# Altium PCB PCB1.PcbDoc
Units mm, origin at the board's own origin, x right, y up, seen from the top; angles counter-clockwise.
Board outline 54 x 60 mm, 2 copper layers (Top Layer, Bottom Layer); 6 components, 0 nets, 6 pads, 0 vias.
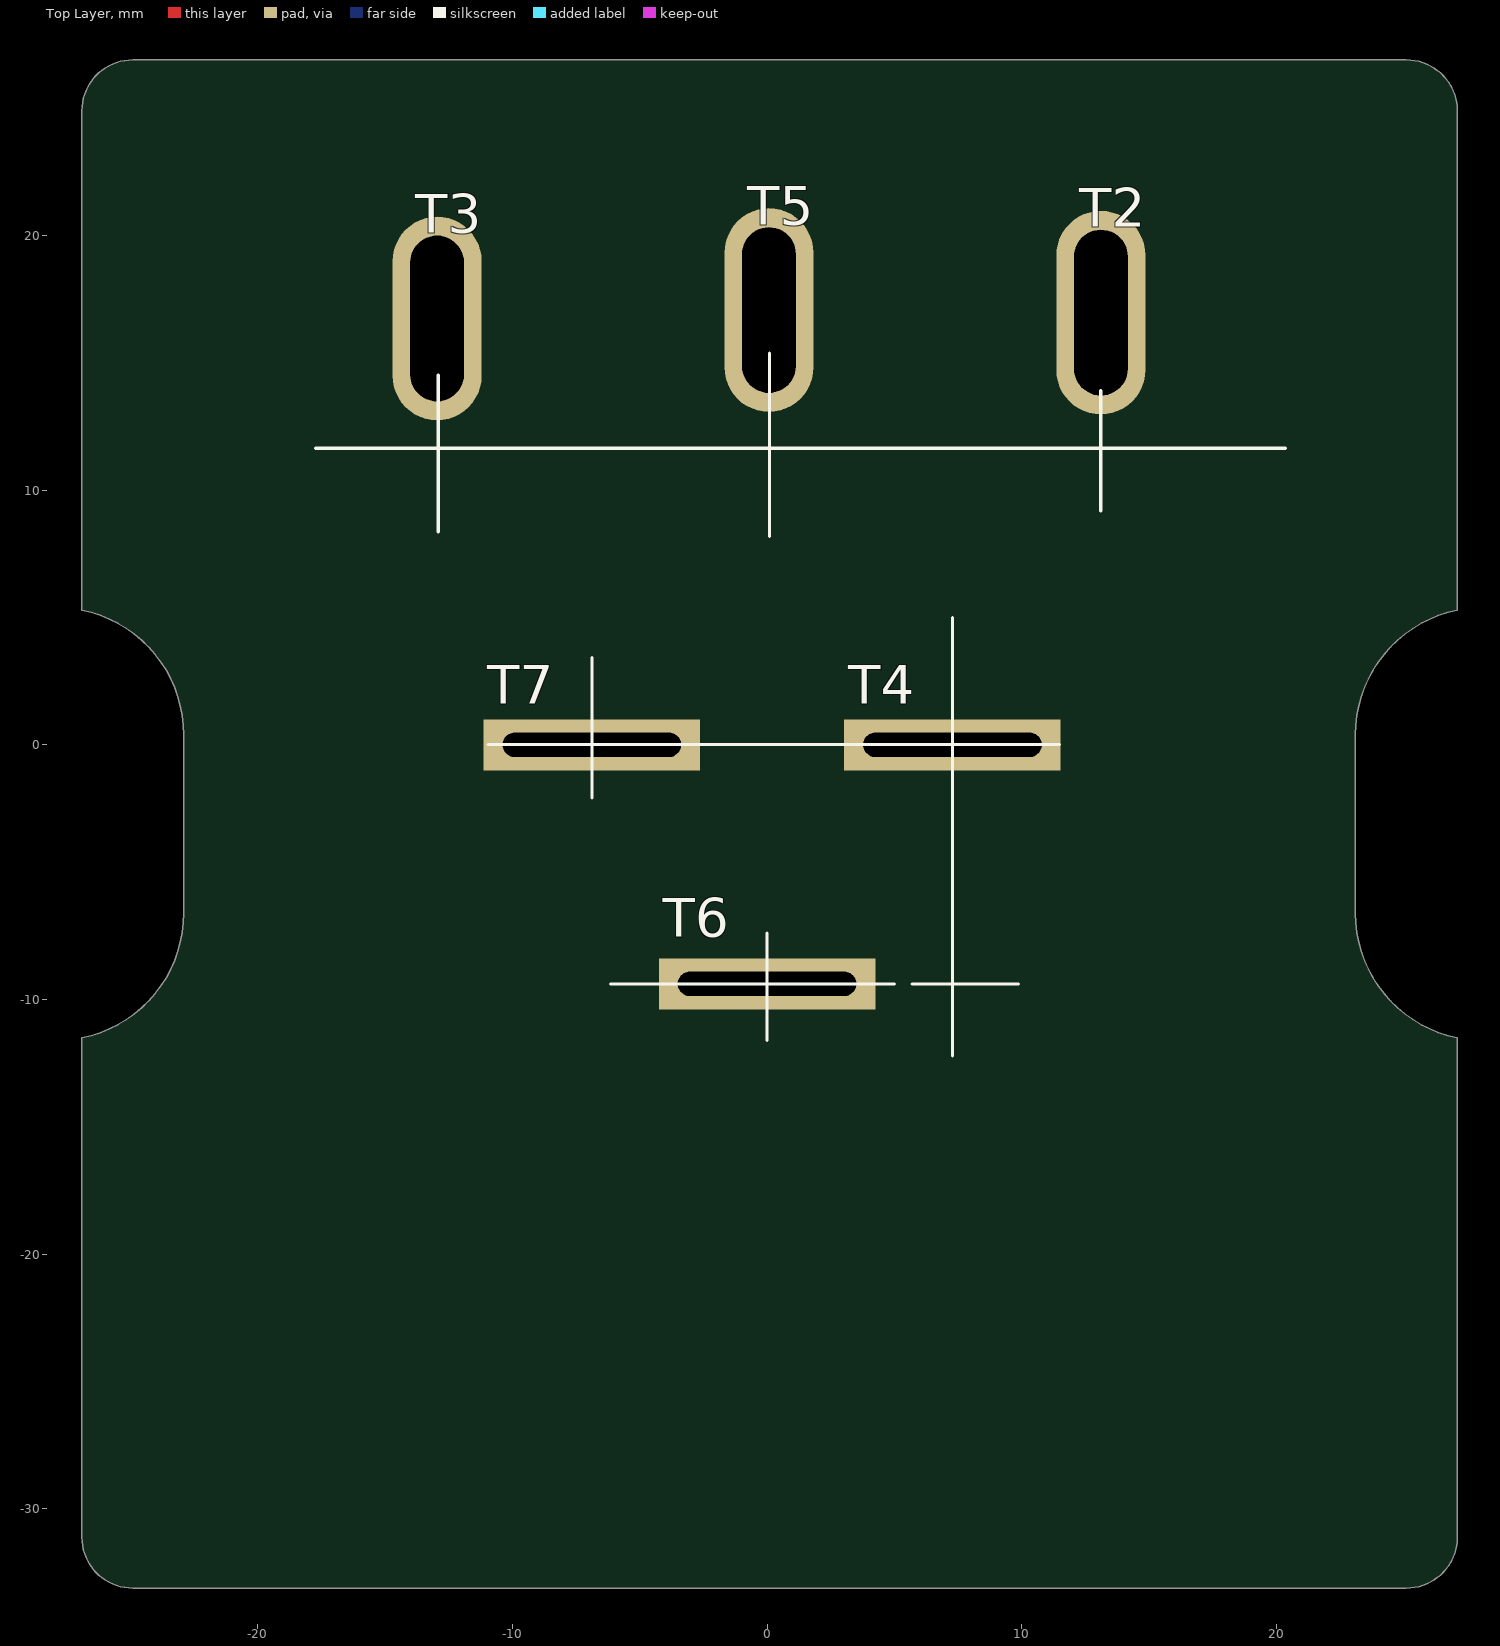
[diagram p0: Top Layer view]
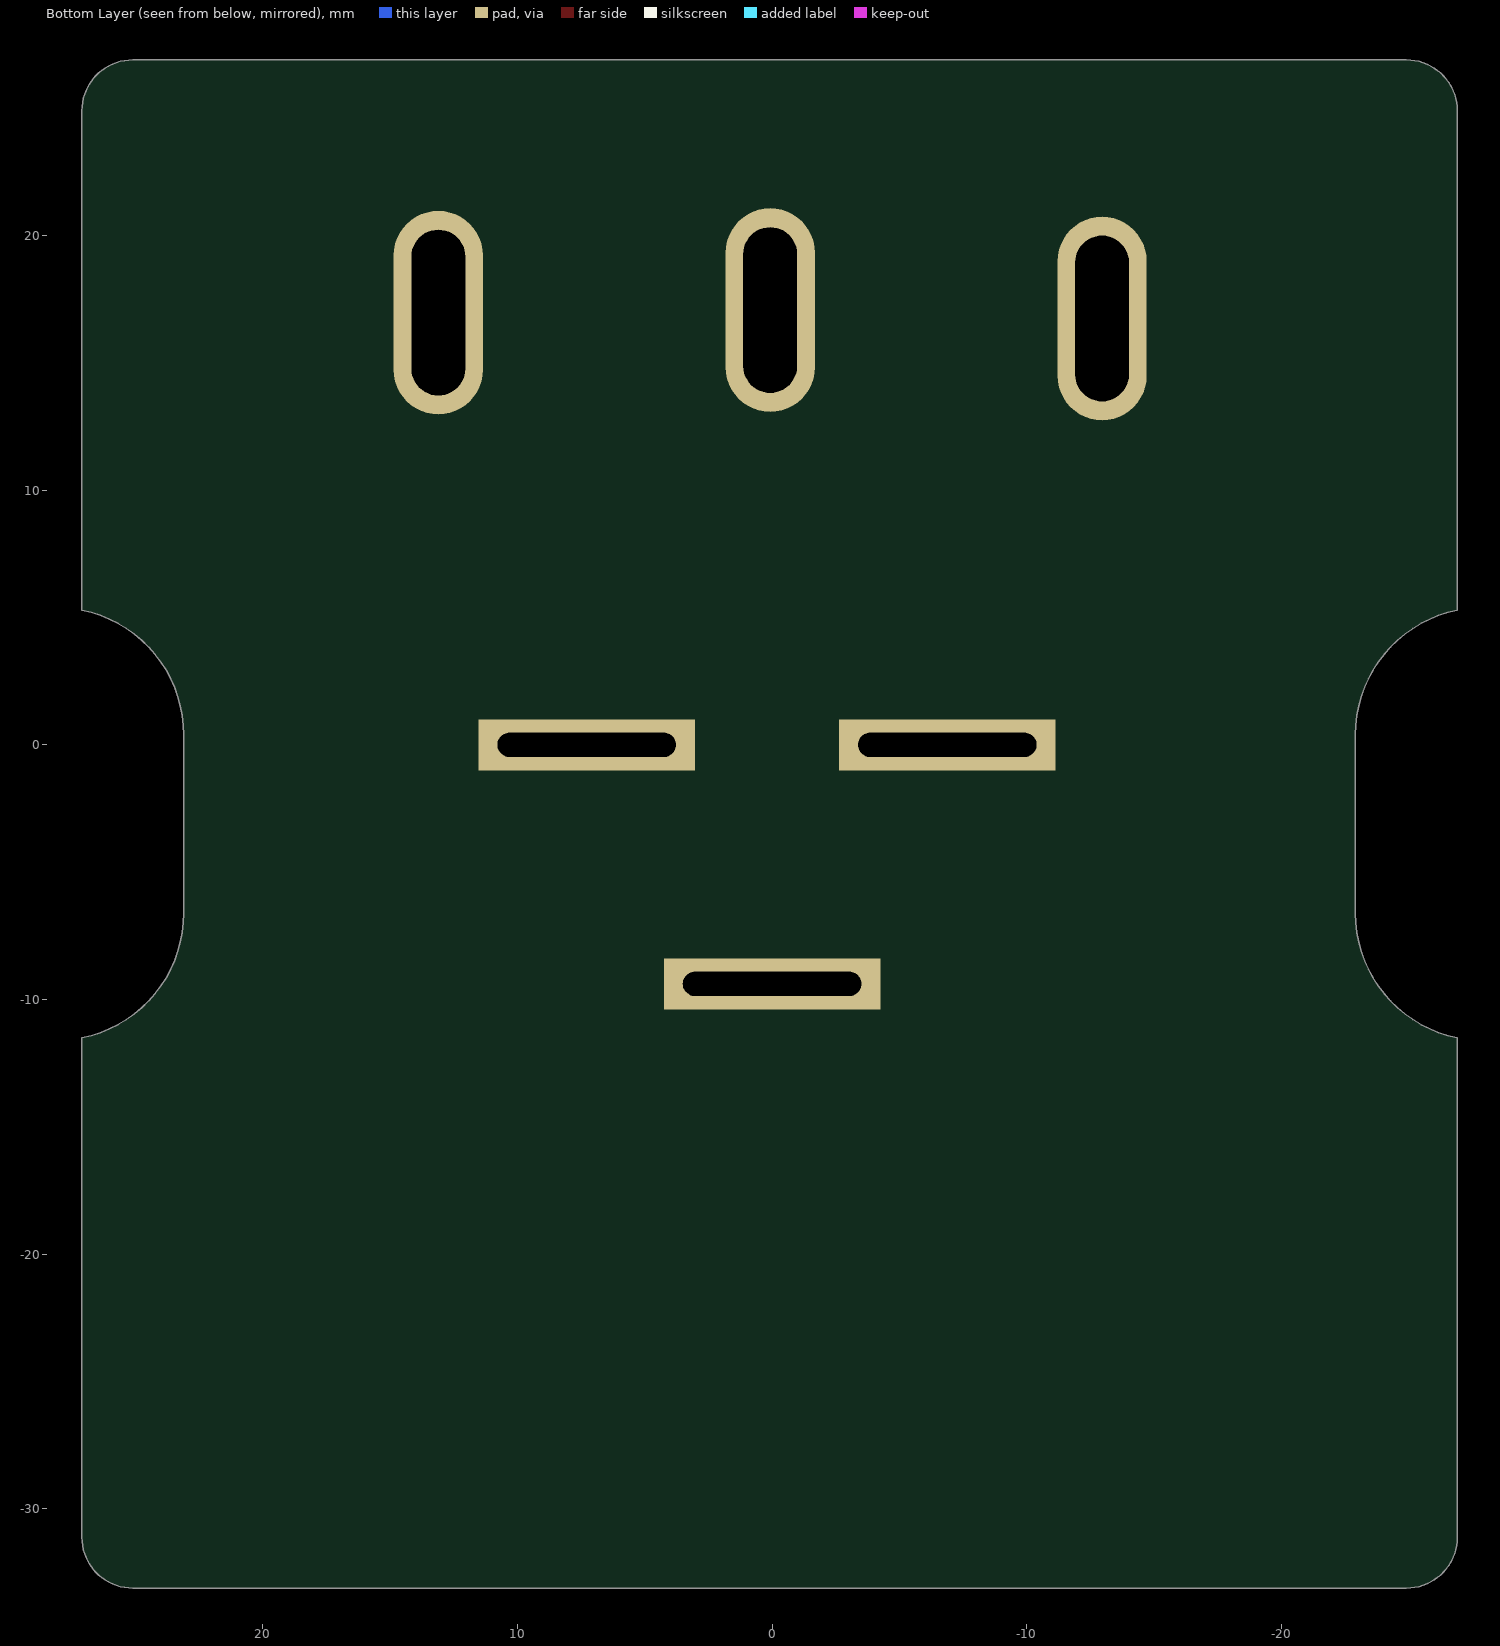
[diagram p1: Bottom Layer view, seen from below]

## Layer stack, top to bottom
Top Layer: signal copper 0.0356
Dielectric: dielectric 0.32, FR-4, Dk 4.8
Bottom Layer: signal copper 0.0356

## Board outline
-26.9,-31.108 ccw(c-24.9,-31.108) -24.9,-33.108 25.1,-33.108 ccw(c25.1,-31.108) 27.1,-31.108 27.1,-11.507 cw(c28.1,-6.608) 23.1,-6.608 23.1,0.392 cw(c28.1,0.392) 27.1,5.291 27.1,24.892 ccw(c25.1,24.892) 25.1,26.892 -24.9,26.892 ccw(c-24.9,24.892) -26.9,24.892 -26.9,5.291 cw(c-27.9,0.392) -22.9,0.392 -22.9,-6.608 cw(c-27.9,-6.608) -26.9,-11.507

## Design rules (kind name [scope] priority, off if disabled: settings)
Clearance [All] p1: gap=0.254
PolygonConnect [All] p1: connectstyle=Relief reliefconductorwidth=0.254 reliefentries=4 polygonreliefangle="90 Angle"
RoutingVias [All] p1: holewidth=0.711 width=1.27 viastyle="Through Hole" minholewidth=0.711 minwidth=1.27 maxholewidth=0.711 maxwidth=1.27
SilkscreenOverComponentPads [All] p1: minsilkscreentomaskgap=0.254
SolderMaskExpansion [All] p1: expansion=0.102
Width [All] p1: maxlimit=0.254 minlimit=0.254 preferedwidth=0.254
27 further rules are at their usual default settings.

## Components (designator, comment, footprint, x,y, rotation, side; value= is the part's Value field where it differs from the comment)
T2 "TP" 220V_HOLE 13.106,16.967 r90 top
T3 "TP" 220V_HOLE -12.954,16.739 r90 top
T4 "TP" 220V_HOLE2#1 7.28,-0.24 r180 top locked
T5 "TP" 220V_HOLE 0.076,17.069 r90 top
T6 "TP" 220V_HOLE2#2 0,-9.385 r180 top locked
T7 "TP" 220V_HOLE2#1 -6.877,-0.24 r180 top locked

## Footprints (in the part's own frame and the unit in brackets; to place one, negate y for a bottom-side part, rotate by r counter-clockwise, add the part's x,y. Pads: shape width x height; smd on the part's side, far side on the other; paste and mask are expansions set on the pad)
220V_HOLE [mm]
  oval 8x3.5 hole 2.1 slot 6.5 at 0 deg: 1(0,0)
220V_HOLE2#1 [mm]
  rect 8.5x2 hole 0.95 slot 7 at 0 deg: 1(0,-0.24)
220V_HOLE2#2 [mm]
  rect 8.5x2 hole 0.95 slot 7 at 0 deg: 1(0,0)

## Nets (pads, with @x,y where several pads share a name; then routed paths per layer and width w, separated by ;. In a path a pad name is that pad's centre, name@x,y a point inside that pad or via, vN(x,y) a via of type N, cw(c..) or ccw(c..) an arc to the next point about the centre after c; other vN are vias at no path point)
pads on no net: T2.1 T3.1 T4.1 T5.1 T6.1 T7.1

## Silkscreen, mask and mechanical layers (free items; w line width, h text height)
Top Overlay:
  lines w0.127: -17.723,11.64 20.352,11.64 ; -12.905,8.365 -12.905,14.512 ; -10.941,0.012 11.481,0.012 ; -6.877,-2.083 -6.877,3.429 ; -6.147,-9.385 5,-9.385 ; 0,-11.608 0,-7.391 ; 0.1,8.187 0.1,15.376 ; 5.696,-9.385 9.862,-9.385 ; 7.28,-12.204 7.28,5 ; 13.1,9.178 13.1,13.902
  text "N" at -17.672,29.097 h1.02
  text "L" at 15.45,28.386 h1.02
Mechanical 1:
  circle w0.127: c7.05,5.63 r0.85
  circle w0.127: c-7.05,5.63 r0.85
  circle w0.127: c25.1,24.892 r1.05
  circle w0.127: c-24.9,-31.108 r1.05
  circle w0.127: c25.1,-31.108 r1.05
  circle w0.127: c-24.9,24.892 r1.05
  lines w0.127: -13.705,20.137 ccw(c-13.705,19.837) -14.005,19.837 -14.005,13.94 ccw(c-13.705,13.94) -13.705,13.64 -12.11,13.64 ; -13.702,20.14 -12.1,20.14 ; -12.105,13.645 ccw(c-12.105,13.945) -11.805,13.945 -11.805,19.845 ccw(c-12.105,19.845) -12.105,20.145 ; -0.7,20.137 ccw(c-0.7,19.837) -1,19.837 -1,13.94 ccw(c-0.7,13.94) -0.7,13.64 0.895,13.64 ; -0.698,20.14 0.905,20.14 ; 0.9,13.645 ccw(c0.9,13.945) 1.2,13.945 1.2,19.845 ccw(c0.9,19.845) 0.9,20.145 ; 12.305,20.137 ccw(c12.305,19.837) 12.005,19.837 12.005,13.94 ccw(c12.305,13.94) 12.305,13.64 13.9,13.64 ; 12.307,20.14 13.91,20.14 ; 13.905,13.645 ccw(c13.905,13.945) 14.205,13.945 14.205,19.845 ccw(c13.905,19.845) 13.905,20.145 ; -26.9,-31.108 ccw(c-24.9,-31.108) -24.9,-33.108 25.1,-33.108 ccw(c25.1,-31.108) 27.1,-31.108 27.1,-11.507 cw(c28.1,-6.608) 23.1,-6.608 23.1,0.392 cw(c28.1,0.392) 27.1,5.291 27.1,24.892 ccw(c25.1,24.892) 25.1,26.892 -24.9,26.892 ccw(c-24.9,24.892) -26.9,24.892 -26.9,5.291 cw(c-27.9,0.392) -22.9,0.392 -22.9,-6.608 cw(c-27.9,-6.608) -26.9,-11.507 -26.9,-31.108 ; -6.9,9.292 ccw(c-6.4,9.292) -5.9,9.292 -5.9,24.292 ccw(c-6.4,24.292) -6.9,24.292 -6.9,9.292 ; 6.1,9.292 ccw(c6.6,9.292) 7.1,9.292 7.1,24.292 ccw(c6.6,24.292) 6.1,24.292 6.1,9.292
Mechanical 15:
  lines w0.127: -26.9,-13.189 -11.045,-13.189 ; -19.611,-20.364 34.872,-20.364 ; -10.941,-11.608 -10.941,26.892 ; -1.373,-33.108 -1.373,-29.108 ; 0.113,-30.785 0.113,-10.338 ; 11.245,-12.351 27.1,-12.351 ; -13.261,-29.12 -13.261,-11.608 13.486,-11.608 13.486,-29.12 -13.261,-29.12

## Dimensions
-26.9,24.892 to 27.1,24.892 on Top Overlay
13.486,-29.12 to -1.373,-33.108 on Mechanical 15
-13.261,-11.608 to -26.9,-13.189 on Mechanical 15
13.486,-11.608 to 27.1,-12.351 on Mechanical 15